# EAGLE board ParasitePCB_3_1_2020 (EAGLE 9.5.2)
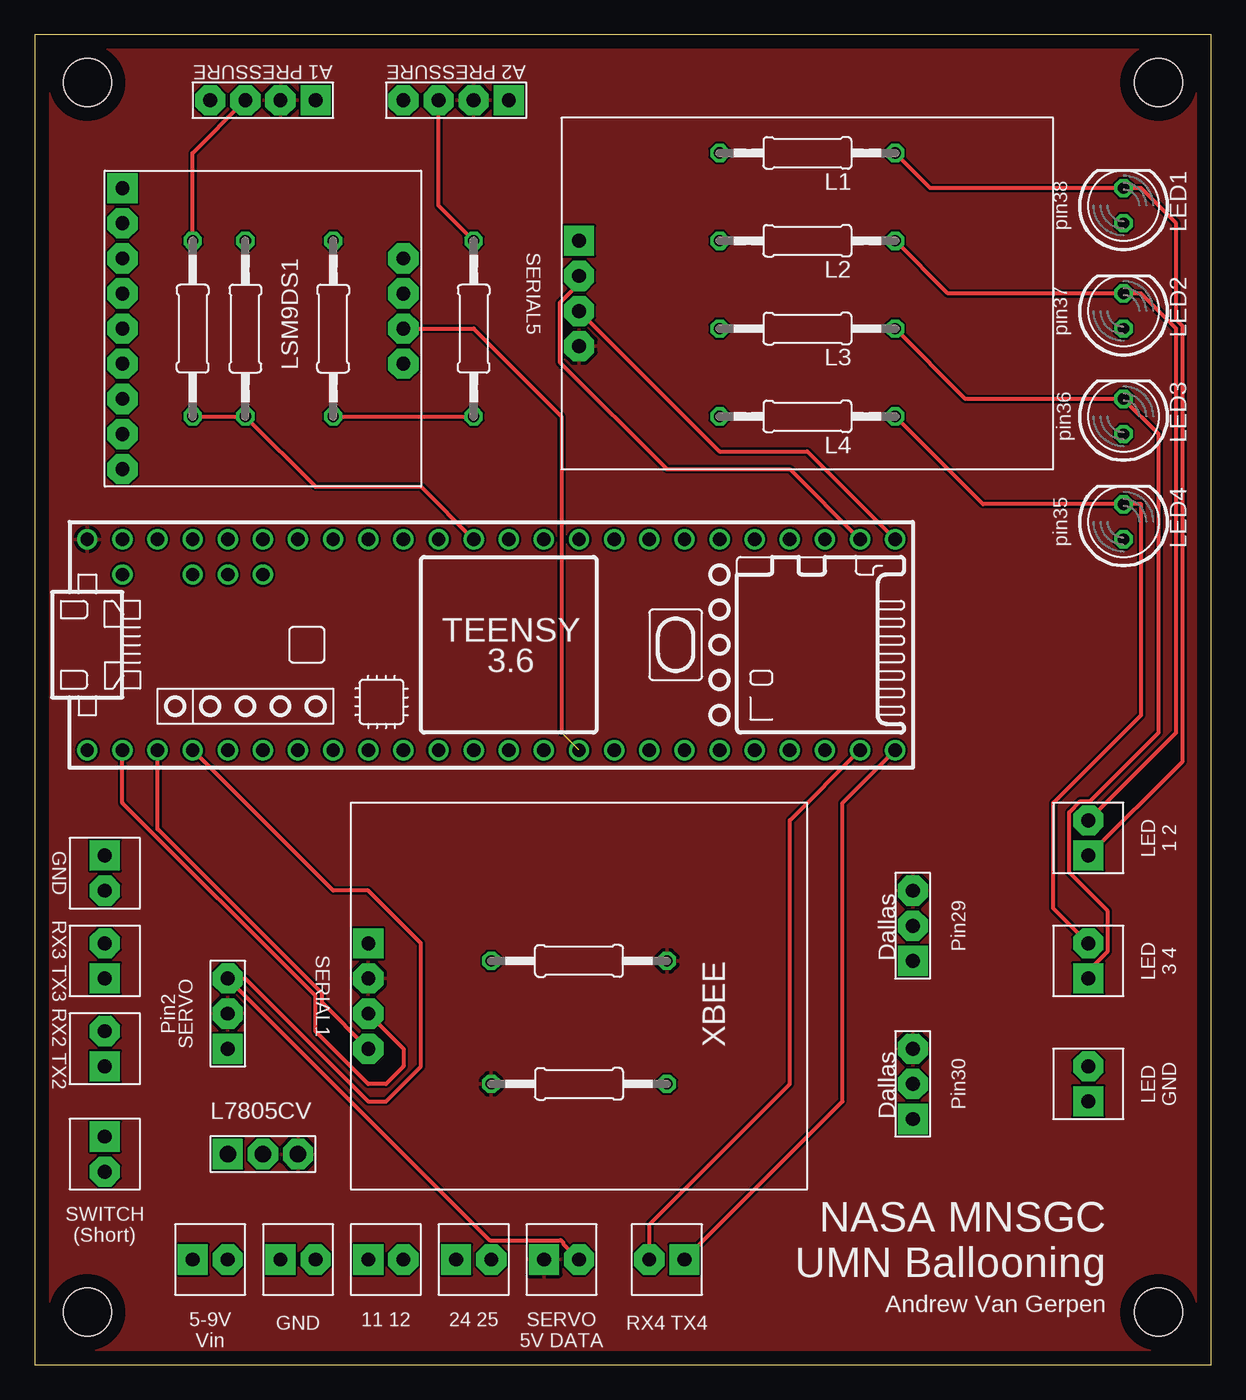
[diagram p0: board, top side]
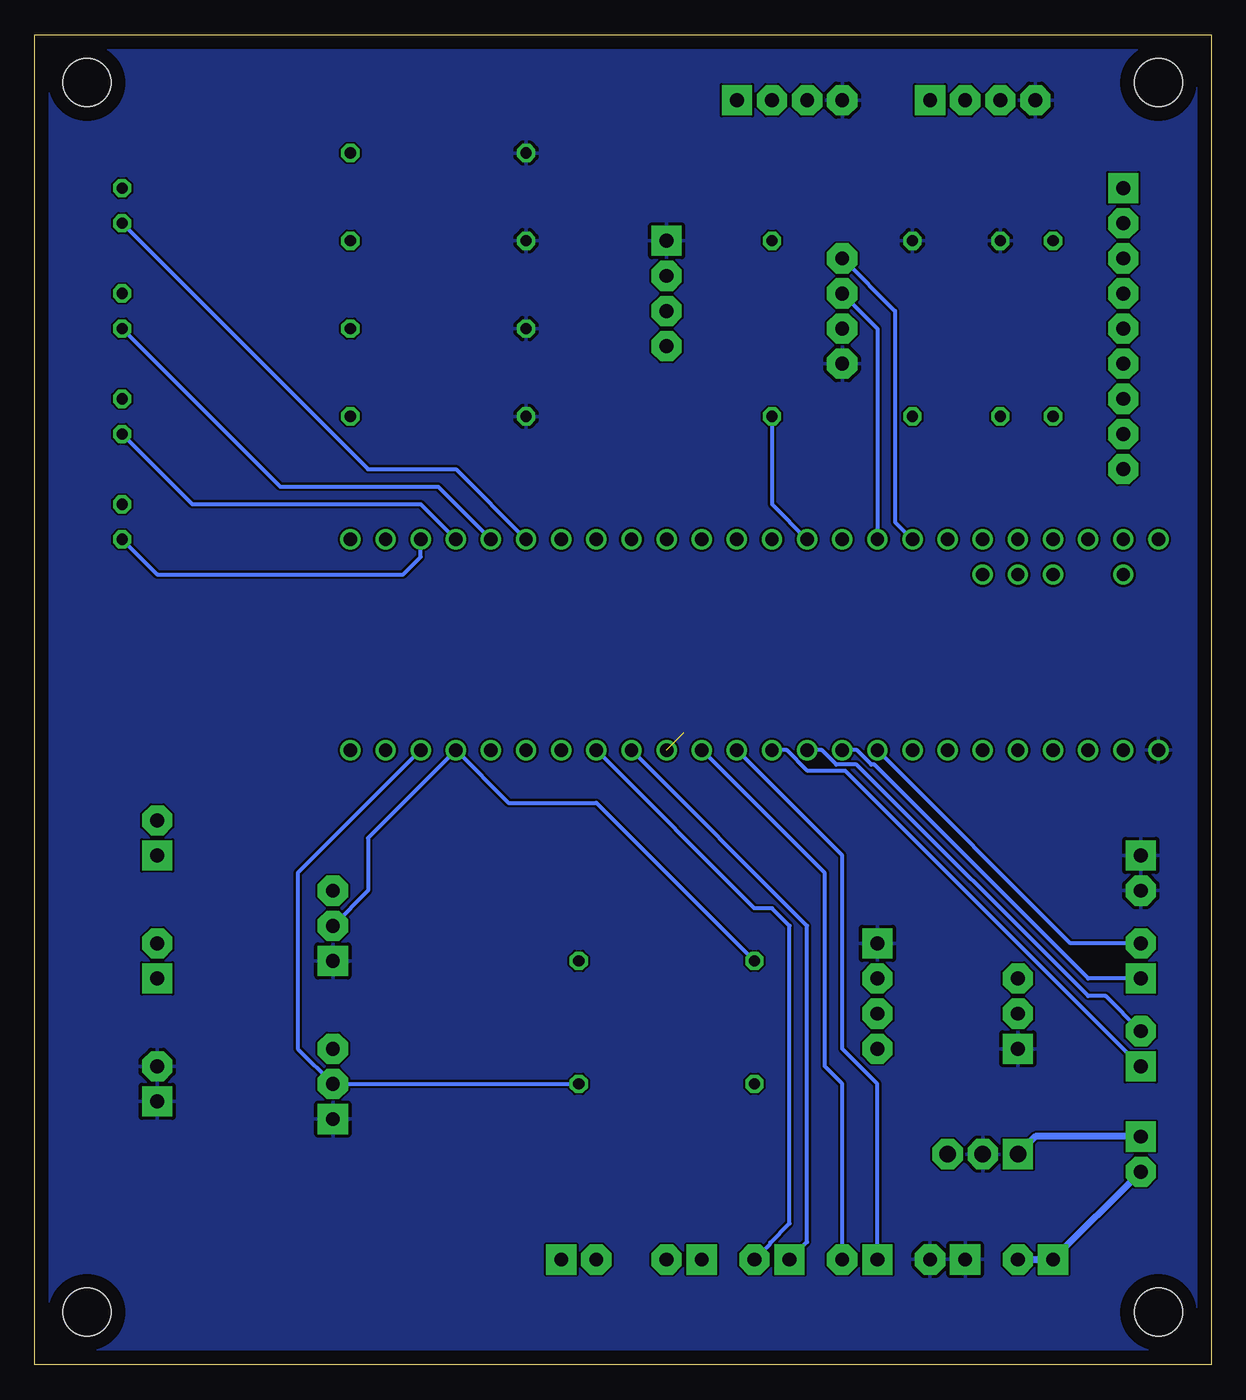
[diagram p1: board, bottom side, seen from below]

Size 85.07 x 96.19 mm. Coordinates in mm from the lower left corner, seen from the top.
Outline: 0,0 85.07,0 85.07,96.19 0,96.19 0,0
Copper layers (1*16): Top 0.035mm / dielectric 1.5mm / Bottom 0.035mm
Design rules "default": minimum track width 6mil, minimum drill 0.35mm, track to track 6mil, track to pad 6mil, pad to pad 6mil, via to via 6mil, smd to smd 6mil, copper to edge 40mil, drill to drill 6mil, minimum pad ring 10mil, minimum via ring 8mil, stop-mask expansion 4mil, vias tented up to drill 0mil, thermal gap 10mil
Holes 3.48 mm at 3.81,92.71 81.28,92.71 81.28,3.81 3.81,3.81

## Footprints (pad centres in the part's own frame; a part is rotated, then mirrored left to right if it is on the bottom)
L7805CV = drill 1.194 pad 2.184 octagon: GND 3.81,1.27; OUT 6.35,1.27 | drill 1.194 pad 2.184 square: IN 1.27,1.27
0207/12 = drill 0.813 octagon: 1 -6.35,0; 2 6.35,0
LED5MM = drill 0.813 octagon: A -1.27,0; K 1.27,0
TERMINALBLOCK = drill 1 pad 2.184 square: L 1.27,2.54 | drill 1 pad 2.184 octagon: R 3.81,2.54
SERVO = drill 1 pad 2.184 octagon: 5V 3.81,1.27; DATA 6.35,1.27 | drill 1 pad 2.184 square: GND 1.27,1.27
TEENSY_3.5/3.6_BASIC = drill 0.965: 0/RX -25.4,-7.62; 1/TX -22.86,-7.62; 2 -20.32,-7.62; 3/CANTX -17.78,-7.62; 3V3 7.62,-7.62; 3V3_LO -22.86,7.62; 4/CANRX -15.24,-7.62; 5 -12.7,-7.62; 6 -10.16,-7.62; 7 -7.62,-7.62; 8 -5.08,-7.62; 9/CS -2.54,-7.62; 10/CS 0,-7.62; 11/MOSI 2.54,-7.62; 12/MISO 5.08,-7.62; 13/SCK 5.08,7.62; 14/A0 2.54,7.62; 15/A1 0,7.62; 16/A2 -2.54,7.62; 17/A3 -5.08,7.62; 18/A4/SDA -7.62,7.62; 19/A5/SCL -10.16,7.62; 20/A6 -12.7,7.62; 21/A7 -15.24,7.62; 21/DAC0 12.7,7.62; 22/A8 -17.78,7.62; 23/A9 -20.32,7.62; 24 10.16,-7.62; 25 12.7,-7.62; 26 15.24,-7.62; 27 17.78,-7.62; 28 20.32,-7.62; 29 22.86,-7.62; 30 25.4,-7.62; 31/A12 27.94,-7.62; 32/A13 30.48,-7.62; 33/A14 30.48,7.62; 34/A15 27.94,7.62; 35/A16 25.4,7.62; 36/A17 22.86,7.62; 37/A18 20.32,7.62; 38/A19 17.78,7.62; 39/A20 15.24,7.62; A10 -17.78,5.08; A11 -15.24,5.08; A22/DAC1 10.16,7.62; AGND -25.4,7.62; AREF -20.32,5.08; GND -27.94,-7.62; GND2 7.62,7.62; VIN -27.94,7.62; VUSB -25.4,5.08
DALLAS = drill 1 pad 2.184 octagon: DATA 3.81,1.27; V 6.35,1.27 | drill 1 pad 2.184 square: GND 1.27,1.27
UBLOX = drill 1 pad 2.184 square: GND 8.89,1.27 | drill 1 pad 2.184 octagon: RX 13.97,1.27; TX 11.43,1.27; VCC 16.51,1.27
LSM9DS1 = drill 1 pad 2.184 octagon: 3V 11.43,21.59; GND 13.97,21.59; P$2 3.81,1.27; P$3 6.35,1.27; P$4 8.89,1.27; P$5 11.43,1.27; P$6 13.97,1.27; P$7 16.51,1.27; P$8 19.05,1.27; P$9 21.59,1.27; SCL 6.35,21.59; SDA 8.89,21.59 | drill 1 pad 2.184 square: P$1 1.27,1.27
HONEYWELL = drill 1 pad 2.184 octagon: 5V 3.81,-1.27; DATA 6.35,-1.27; GND 8.89,-1.27 | drill 1 pad 2.184 square: NOTHING 1.27,-1.27
XBEE = drill 1 pad 2.184 octagon: 5V 12.7,1.27; DIN 17.78,1.27; DOUT 15.24,1.27 | drill 1 pad 2.184 square: GND 10.16,1.27

## Placement (x,y rotation side)
HELLO  L7805CV  [L7805CV]  12.7,13.97 0 top
L1  [0207/12]  55.88,87.63 180 top
L2  [0207/12]  55.88,81.28 180 top
L3  [0207/12]  55.88,74.93 180 top
L4  [0207/12]  55.88,68.58 180 top
LED1  [LED5MM]  78.74,83.82 90 top
LED2  [LED5MM]  78.74,76.2 90 top
LED3  [LED5MM]  78.74,68.58 90 top
LED4  [LED5MM]  78.74,60.96 90 top
LED34  TERMINALBLOCK  [TERMINALBLOCK]  78.74,35.56 90 top
R1  4.7k  [0207/12]  39.37,29.21 0 top
R2  4.7k  [0207/12]  39.37,20.32 180 top
R7  1k  [0207/12]  11.43,74.93 90 top
R8  2k  [0207/12]  15.24,74.93 270 top
R9  1k  [0207/12]  31.75,74.93 90 top
R10  2k  [0207/12]  21.59,74.93 270 top
SERIAL4  TERMINALBLOCK  [TERMINALBLOCK]  48.26,10.16 180 top
SERVO  SERVO  [SERVO]  15.24,21.59 90 top
U$1  TEENSY_3.5/3.6_BASIC  [TEENSY_3.5/3.6_BASIC]  31.75,52.07 0 top
U$2  DALLAS  [DALLAS]  64.77,27.94 90 top
U$3  UBLOX  [UBLOX]  38.1,90.17 270 top
U$4  TERMINALBLOCK  [TERMINALBLOCK]  7.62,20.32 90 top
U$5  TERMINALBLOCK  [TERMINALBLOCK]  7.62,26.67 90 top
U$6  TERMINALBLOCK  [TERMINALBLOCK]  78.74,17.78 90 top
U$7  TERMINALBLOCK  [TERMINALBLOCK]  2.54,17.78 270 top
U$8  TERMINALBLOCK  [TERMINALBLOCK]  16.51,5.08 0 top
U$9  TERMINALBLOCK  [TERMINALBLOCK]  10.16,5.08 0 top
U$10  TERMINALBLOCK  [TERMINALBLOCK]  78.74,26.67 90 top
U$11  LSM9DS1  [LSM9DS1]  5.08,86.36 270 top
U$12  DALLAS  [DALLAS]  64.77,16.51 90 top
U$13  HONEYWELL  [HONEYWELL]  21.59,90.17 180 top
U$14  HONEYWELL  [HONEYWELL]  35.56,90.17 180 top
U$15  XBEE  [XBEE]  22.86,40.64 270 top
U$16  TERMINALBLOCK  [TERMINALBLOCK]  29.21,5.08 0 top
U$17  TERMINALBLOCK  [TERMINALBLOCK]  22.86,5.08 0 top
U$18  TERMINALBLOCK  [TERMINALBLOCK]  35.56,5.08 0 top
U$19  TERMINALBLOCK  [TERMINALBLOCK]  2.54,38.1 270 top

## Library data of the parts
HELLO = L7805CV
L1-L4 R1 R2 R7-R10 = rcl; SPICEPREFIX: R
LED1-LED4 = led
LED34 SERIAL4 U$4-U$10 U$16-U$19 = TERMINALBLOCK
SERVO = SERVO
U$1 = Teensy356
U$2 U$12 = DALLAS
U$3 = UBLOX
U$11 = LSM9DS1
U$13 U$14 = HONEYWELL
U$15 = XBEE

## Nets
+3V3: U$1.3V3 U$11.3V
+5V: HELLO.OUT R1.2 R2.2 SERVO.5V U$1.VIN U$2.V U$3.VCC U$12.V U$13.5V U$14.5V U$15.5V U$18.L
GND: HELLO.GND L1.2 L2.2 L3.2 L4.2 R8.1 R10.1 SERVO.GND U$1.GND U$2.GND U$3.GND U$6.L U$6.R U$8.L U$8.R U$11.GND U$12.GND U$13.GND U$14.GND U$15.GND U$19.L U$19.R
N$1: R2.1 U$1.30 U$12.DATA
N$2: U$7.R U$9.L U$9.R
N$3: R1.1 U$1.29 U$2.DATA
N$4: U$1.9/CS U$4.R
N$5: LED1.A U$1.38/A19
N$6: LED2.A U$1.37/A18
N$7: LED3.A U$1.36/A17
N$8: LED4.A U$1.35/A16
N$9: U$1.0/RX U$15.DOUT
N$10: HELLO.IN U$7.L
N$11: U$1.10/CS U$4.L
N$12: U$1.18/A4/SDA U$11.SDA
N$13: L1.1 LED1.K LED34.L
N$14: L2.1 LED2.K LED34.R
N$15: L3.1 LED3.K U$10.L
N$16: L4.1 LED4.K U$10.R
N$17: U$1.19/A5/SCL U$11.SCL
N$18: U$1.7 U$5.R
N$19: U$1.1/TX U$15.DIN
N$20: U$1.8 U$5.L
N$21: R7.2 U$13.DATA
N$22: R7.1 R8.2 U$1.15/A1
N$23: U$1.34/A15 U$3.TX
N$24: U$1.33/A14 U$3.RX
N$25: R9.2 U$14.DATA
N$26: R9.1 R10.2 U$1.16/A2
N$27: SERVO.DATA U$1.2 U$18.R
N$28: SERIAL4.R U$1.31/A12
N$29: SERIAL4.L U$1.32/A13
N$30: U$1.11/MOSI U$17.L
N$31: U$1.12/MISO U$17.R
N$32: U$1.24 U$16.L
N$33: U$1.25 U$16.R

## Tracks (layer width: path | path; a pad name or v marks a point on that pad's centre or on a via)
+3V3  (1 unrouted)
  Top 0.305: U$11.3V 31.75,74.93 38.1,68.58 38.1,45.72
+5V
  pour Top: -5.08,100.33 -5.08,-5.08 91.44,-5.08 91.44,100.33
GND
  pour Bottom: -3.81,99.06 -3.81,-2.54 90.17,-2.54 90.17,99.06
N$1
  Bottom 0.305: U$1.30 66.04,35.56 66.04,22.86 U$12.DATA R2.1
N$2
  Bottom 0.508: U$9.R U$9.L U$7.R
N$3
  Bottom 0.305: U$2.DATA 60.96,34.29 60.96,38.1 U$1.29 50.8,40.64 44.45,40.64 R1.1
N$4
  Bottom 0.305: U$4.R 7.62,26.67 8.89,26.67 25.63,43.41 27.1,43.41 28.14,44.45 U$1.9/CS
N$5
  Bottom 0.305: LED1.A 60.96,64.77 54.61,64.77 U$1.38/A19
N$6
  Bottom 0.305: LED2.A 67.31,63.5 55.88,63.5 U$1.37/A18
N$7
  Bottom 0.305: LED3.A 73.66,62.23 57.15,62.23 U$1.36/A17
N$8
  Bottom 0.305: LED4.A 76.2,57.15 58.42,57.15 57.15,58.42 U$1.35/A16
N$9
  Top 0.305: U$15.DOUT 26.67,22.86 26.67,21.59 25.4,20.32 24.13,20.32 20.32,24.13 20.32,26.67 6.35,40.64 U$1.0/RX
N$10
  Bottom 0.508: U$7.L 12.7,16.51 HELLO.IN
N$11
  Bottom 0.305: U$4.L 26.44,42.95 29.18,42.95 30.68,44.45 U$1.10/CS
N$12
  Bottom 0.305: U$11.SDA 24.13,74.93 U$1.18/A4/SDA
N$13
  Top 0.305: LED34.L 83.01,43.64 83.01,75.12 82.55,75.58 82.55,82.55 80.01,85.09 LED1.K 64.77,85.09 L1.1
N$14
  Top 0.305: LED34.R 82.55,45.72 82.55,74.93 80.01,77.47 LED2.K 66.04,77.47 L2.1
N$15
  Top 0.305: U$10.L 76.2,28.5 77.6,29.9 77.6,32.82 74.8,35.61 74.8,39.95 75.62,40.77 76.33,40.77 81.28,45.72 81.28,67.31 LED3.K 67.31,69.85 L3.1
N$16
  Top 0.305: U$10.R 73.66,33.02 73.66,40.64 80.01,46.99 80.01,62.23 LED4.K 68.58,62.23 L4.1
N$17
  Bottom 0.305: U$11.SCL 22.86,76.2 22.86,60.96 U$1.19/A5/SCL
N$18
  Bottom 0.305: U$5.R 10.16,30.48 U$1.7
N$19
  Top 0.305: U$15.DIN 20.78,26.21 20.78,26.86 8.89,38.75 U$1.1/TX
N$20
  Bottom 0.305: U$5.L 8.89,27.94 24.36,43.41 24.56,43.41 25.6,44.45 U$1.8
N$21
  Top 0.305: R7.2 11.43,87.63 U$13.DATA
N$22
  Top 0.305: R7.1 R8.2 20.32,63.5 27.94,63.5 U$1.15/A1
N$23
  Top 0.305: U$3.TX 39.37,78.18 37.97,76.78 37.97,72.52 45.72,64.77 54.61,64.77 U$1.34/A15
N$24
  Top 0.305: U$3.RX 49.53,66.04 55.88,66.04 U$1.33/A14
N$25
  Top 0.305: R9.2 29.21,83.82 U$14.DATA
N$26
  Top 0.305: R10.2 R9.1
  Bottom 0.305: R9.1 31.75,62.23 U$1.16/A2
N$27
  Top 0.305: U$18.R 38.23,8.76 38.23,8.84 38.05,9.02 32.89,9.02 SERVO.DATA 15.24,27.94 24.13,19.05 25.4,19.05 27.94,21.59 27.94,30.48 24.13,34.29 21.59,34.29 U$1.2
N$28
  Top 0.305: SERIAL4.R 44.45,10.16 54.61,20.32 54.61,39.37 U$1.31/A12
N$29
  Top 0.305: SERIAL4.L 58.42,19.05 58.42,40.64 U$1.32/A13
N$30
  Bottom 0.305: U$17.L 24.13,20.32 26.67,22.86 26.67,36.83 U$1.11/MOSI
N$31
  Bottom 0.305: U$17.R 26.67,20.32 27.94,21.59 27.94,35.56 U$1.12/MISO
N$32
  Bottom 0.305: U$16.L 29.21,8.89 29.21,31.75 U$1.24
N$33
  Bottom 0.305: U$16.R 31.88,8.76 31.88,8.84 30.48,10.23 30.48,31.75 31.75,33.02 33.02,33.02 U$1.25

## Text on the board
tNames: A1 PRESSURE | A2 PRESSURE | pin38 | SERIAL5 | pin37 | pin36 | pin35 | LED / 1 2 | GND | Pin29 | RX3 TX3 | LED / 3 4 | SERIAL1 | Pin2 | SERVO | RX2 TX2 | Pin30 | LED / GND | SWITCH / (Short) | NASA MNSGC / UMN Ballooning | 11 12 | 24 25 | Andrew Van Gerpen | GND | RX4 TX4 | 5-9V / Vin | SERVO / 5V DATA